# Altium PCB Ethernet_bridge(TOP).PcbDoc
Units mil, origin at the board's own origin, x right, y up, seen from the top; angles counter-clockwise.
Board outline 3110.24 x 1181.1 mil, 2 copper layers (Top Layer, Bottom Layer), stack 34.8 mil thick; 72 components, 56 nets, 258 pads, 0 vias.
Unrouted connection lines stored in the file: 167.
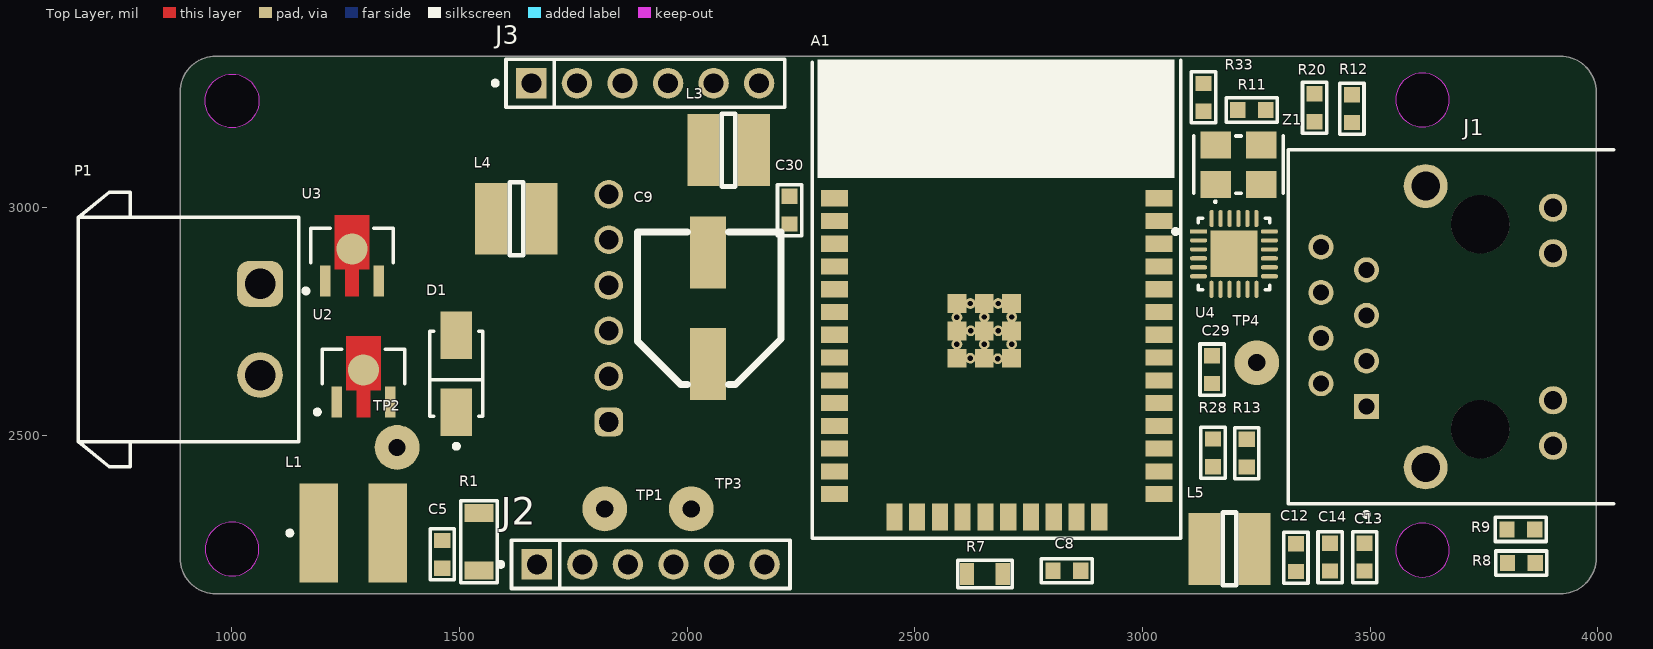
[diagram p0: Top Layer view]
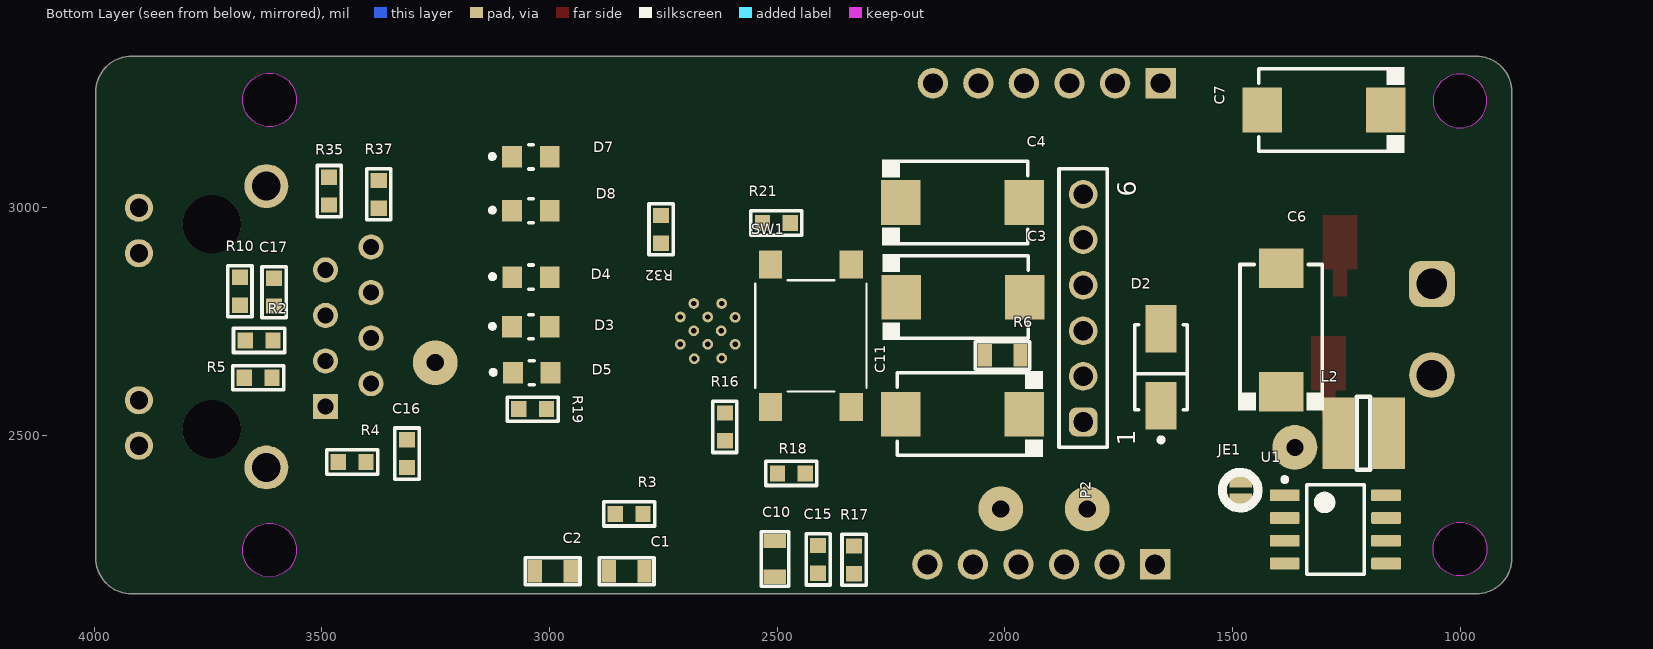
[diagram p1: Bottom Layer view, seen from below]

## Layer stack, top to bottom
Top Solder: solder mask 0.4, Solder Resist, Dk 3.5
Top Layer: signal copper 1.4
Dielectric 1: core 32, Core-025, Dk 4.6
Bottom Layer: signal copper 1.4
Bottom Solder: solder mask 0.4, Solder Resist, Dk 3.5

## Board outline
964.99,2151.25 cw(c964.99,2229.99) 886.25,2229.99 886.25,3253.61 cw(c964.99,3253.61) 964.99,3332.35 3917.75,3332.35 cw(c3917.75,3253.61) 3996.49,3253.61 3996.49,2229.99 cw(c3917.75,2229.99) 3917.75,2151.25
cut-out: 3555.94,2247.39 ccw(c3614.99,2247.39) 3614.99,2188.34 ccw(c3614.99,2247.39) 3674.05,2247.39 ccw(c3614.99,2247.39) 3614.99,2306.45 ccw(c3614.99,2247.39)
cut-out: 3555.94,3236.21 ccw(c3614.99,3236.21) 3614.99,3177.16 ccw(c3614.99,3236.21) 3674.05,3236.21 ccw(c3614.99,3236.21) 3614.99,3295.27 ccw(c3614.99,3236.21)
cut-out: 1000.42,3174.87 cw(c1000.42,3233.93) 941.37,3233.93 cw(c1000.42,3233.93) 1000.42,3292.98 cw(c1000.42,3233.93) 1059.48,3233.93 cw(c1000.42,3233.93)
cut-out: 941.37,2249.68 ccw(c1000.42,2249.68) 1000.42,2190.62 ccw(c1000.42,2249.68) 1059.48,2249.68 ccw(c1000.42,2249.68) 1000.42,2308.73 ccw(c1000.42,2249.68)

## Design rules (kind name [scope] priority, off if disabled: settings)
Clearance [All] p1: gap=1 ignorepadtopadclearanceinfootprint=TRUE
ComponentClearance [All] p1: gap=-100 collisioncheckmode=3 verticalgap=-100 showdistances=FALSE
PolygonConnect [All] p1: connectstyle=Relief reliefconductorwidth=10 reliefentries=4 polygonreliefangle="90 Angle" airgapwidth=10
RoutingVias [All] p1: holewidth=28 width=50 viastyle="Through Hole" minholewidth=28 minwidth=50 maxholewidth=28 maxwidth=50
SolderMaskExpansion [All] p1: expansion=4 istentingtop=FALSE
SupplyNets "Schematic Supply Nets_6" [InNet('GND')] p1: voltage=0.000
SupplyNets "Schematic Supply Nets_5" [InNet('+5V')] p2: voltage=0.000
SupplyNets "Schematic Supply Nets_4" [InNet('VCC')] p3: voltage=0.000
SupplyNets "Schematic Supply Nets_2" [InNet('+3V3_MCU')] p4: voltage=0.000
SupplyNets "Schematic Supply Nets_1" [InNet('3v3')] p5: voltage=0.000
Width [All] p1: maxlimit=10 minlimit=10 preferedwidth=10
29 further rules are at their usual default settings.

## Components (designator, comment, footprint, x,y, rotation, side; value= is the part's Value field where it differs from the comment)
A1 "MOD-ESP32-WROOM-32E" MOD-ESP32-WROOM-32E 2680.09,2670.34 r0 top
C1 "10uF" CAP-0805 2830.63,2200.99 r180 bottom
C2 "0.1uF" CAP-0805 2993,2201 r180 bottom
C3 "100uF_16V" CAP-TAN-D 2092,2803 r180 bottom
C4 "100uF_16V" CAP-TAN-D 2093,3011 r180 bottom
C5 "470pF" CAP-0603 1462,2238 r90 top
C6 "100uF_16V" CAP-TAN-D 1393,2731 r90 bottom
C7 "100uF_16V" CAP-TAN-D 1299,3214 r0 bottom
C8 "0.1uF" CAP-0603 2834,2202 r0 top
C9 "330uF 25V" CAP_SMD_Size_E 2046,2781 r270 top
C10 "0.47uF" CAP-0805 2505,2228 r90 bottom
C11 "47uF_16V" CAP-TAN-D 2093,2546 r0 bottom
C12 "0.1uF" CAP-0603 3337,2231 r90 top
C13 "1uF" CAP-0603 3488,2232 r90 top
C14 "470pF" CAP-0603 3412,2232 r90 top
C15 "0.1uF" CAP-0603 2410,2227 r90 bottom
C16 "0.1uF" CAP-0603 3313,2459.51 r90 bottom
C17 "22nF" CAP-0603 3605,2814 r90 bottom
C29 "0.1uF" CAP-0603 3153,2644 r90 top
C30 "0.1uF" CAP-0603 2225,2994 r90 top
D1 "ES1G" FP-403AE-MFG 1493,2635 r90 top
D2 "SS14" DO-214-AC 1657,2649 r270 bottom
D3 "LED" LED_GREEN 3041,2738 r180 bottom
D4 "LED" LED_RED 3040.66,2847 r180 bottom
D5 "LED" LED_RED 3039,2637 r180 bottom
D7 "LED" LED_GREEN 3041,3111 r180 bottom
D8 "LED" LED_RED 3041,2993 r180 bottom
J1 "RJ45" RJ-45 3744.95,2738 r90 top
J2 "PLS-2.54x6_25mm" PLS2.54x25mm 1920,2216 r0 top
J3 "PLS-2.54x6_25mm" PLS2.54x25mm 1908,3273 r0 top
JE1 "Jumper" JE 1483,2379 r180 bottom
L1 "470µH" WE-PD2_5848 1267,2285 r0 top
L2 "220uH" Coil_4.5x4.5_mm 1212,2504 r180 bottom
L3 "33uH" Coil_4.5x4.5_mm 2091,3126 r0 top
L4 "220uH" Coil_4.5x4.5_mm 1625,2975 r0 top
L5 "470uH" Coil_4.5x4.5_mm 3191,2250 r0 top
P1 "691305540002" 691305540002 904.52,2732 r270 top
P2 "61300611121" 61300611121 1828,2779 r90 bottom
R1 "0.33" RES-1206 1543,2266 r90 top
R2 "49.9R 1%" RES-0603 3638,2708 r180 bottom
R3 "49.9R 1%" RES-0603 2825,2327 r180 bottom
R4 "49.9R 1%" RES-0603 3433.49,2441 r180 bottom
R5 "49.9R 1%" RES-0603 3640,2626 r180 bottom
R6 "3.8K" RES-0805 2005,2675 r180 bottom
R7 "1.2K" RES-0805 2654,2195 r0 top
R8 "1K" RES-0603 3832,2219 r0 top
R9 "1K" RES-0603 3831,2293 r0 top
R10 "33R" RES-0603 3680,2816 r90 bottom
R11 "12.1K  1%" RES-0603 3240,3214 r0 top
R12 "1.5K" RES-0603 3460,3217 r90 top
R13 "10K" RES-0603 3229,2460.51 r90 top
R16 "10K" RES-0603 2615,2518 r90 bottom
R17 "220" RES-0603 2331,2226 r90 bottom
R18 "220" RES-0603 2469,2416 r180 bottom
R19 "220" RES-0603 3037,2557 r180 bottom
R20 "10K" RES-0603 3378,3219 r90 top
R21 "10K" RES-0603 2502,2966 r180 bottom
R28 "10K" RES-0603 3155,2461 r90 top
R32 "220" RES-0603 2755,2952 r270 bottom
R33 "220" RES-0603 3134,3242 r90 top
R35 "33R" RES-0603 3484,3036 r90 bottom
R37 "10K" RES-0603 3375,3029 r90 bottom
SW1 "430152050826" 430152050826 2426,2718 r90 bottom
TP1 "Test_Point_PCB" Test_Point 1819,2338 r0 top
TP2 "Test_Point_PCB" Test_Point 1363,2473 r0 top
TP3 "Test_Point_PCB" Pin_Test_Point(Orange) 2009,2338 r0 top
TP4 "Test_Point_PCB" Test_Point 3251,2659 r0 top
U1 "MC34063" SOIC-8_M 1274,2293 r180 bottom
U2 "AMS1117" SOT-89#1 1289.06,2643.12 r0 top
U3 "AMS1117-3.3" SOT-89#2 1264,2909 r0 top
U4 "LAN7820A" 24QFN-4x4B-IPC_A 3201,2898 r0 top
Z1 "50.00 Mhz" "50.00Mhz active quartz" 3211,3094 r0 top

## Footprints (in the part's own frame and the unit in brackets; to place one, negate y for a bottom-side part, rotate by r counter-clockwise, add the part's x,y. Pads: shape width x height; smd on the part's side, far side on the other; paste and mask are expansions set on the pad)
24QFN-4x4B-IPC_A [mm]
  rect 0.961x0.239 smd paste+0 mask+0: 1(-1.976,1.25)
  rrect100% 0.961x0.239 smd paste+0 mask+0: 2(-1.976,0.75) 3(-1.976,0.25) 4(-1.976,-0.25) 5(-1.976,-0.75) 6(-1.976,-1.25) 13(1.976,-1.25) 14(1.976,-0.75) 15(1.976,-0.25) 16(1.976,0.25) 17(1.976,0.75) 18(1.976,1.25)
  rrect100% 0.239x0.961 smd paste+0 mask+0: 7(-1.25,-1.976) 8(-0.75,-1.976) 9(-0.25,-1.976) 10(0.25,-1.976) 11(0.75,-1.976) 12(1.25,-1.976) 19(1.25,1.976) 20(0.75,1.976) 21(0.25,1.976) 22(-0.25,1.976) 23(-0.75,1.976) 24(-1.25,1.976)
  rect 2.6x2.6 smd paste-1000 mask+0: 25(0,0)
  silkscreen extent -3.38,-2 2,2, body extent -2,-2 2,2, height 1
"50.00Mhz active quartz" [mm] "50.00Mhz active quartz"
  rect 1.7x1.5 smd: 1(-1.27,-1.1) 2(1.27,-1.1) 3(1.27,1.1) 4(-1.27,1.1)
  silkscreen extent -2.5,-2.1 2.5,1.6, body extent -2.5,-1.6 2.5,1.6, height 1.29
61300611121 [mm] "Pin Header, pitch 2.54 mm, THT, Vertical, single row, 6p"
  rrect50% 1.6x1.6 hole 1.1: 1(-6.35,0)
  round 1.6 hole 1.1: 2(-3.81,0) 3(-1.27,0) 4(1.27,0) 5(3.81,0) 6(6.35,0)
  silkscreen extent -7.77,-1.35 7.77,1.35, body extent -7.62,-1.27 7.62,1.27, height 8.57
430152050826 [mm] "SMD Tact Switch, body 6x6mm"
  rect 1.55x1.3 smd: A1(-3.975,2.25) A2(3.975,2.25) B1(-3.975,-2.25) B2(3.975,-2.25)
  silkscreen extent -3.1,-3.1 3.1,3.1, body extent -4.5,-3.1 4.5,3.1, height 5
691305540002 [mm] "5,08mm - PCB Header Horizontal Entry with Plastic Latches - 02p"
  rrect50% 2.55x2.55 hole 1.7: 1(-2.54,4)
  round 2.55 hole 1.7: 2(2.54,4)
  silkscreen extent -7.65,-6.15 7.65,6.15, body extent -7.48,-6 7.48,6, height 8.63
CAP-0603 [mm]
  rect 0.85x0.9 smd: 1(-0.775,0) 2(0.775,0)
  silkscreen extent -1.43,-0.67 1.43,0.67, body extent -0.8,-0.4 0.8,0.4, height 0.8
CAP-0805 [mm]
  rect 0.8x1.25 smd mask+0.015: 1(-1,0) 2(1,0)
  silkscreen extent -1.52,-0.76 1.52,0.76, body extent -1,-0.62 1,0.63, height 0.8
CAP-TAN-D [mm]
  rect 2.2x2.5 smd: 1(-3.45,0) 2(3.45,0)
  silkscreen extent -4.5,-2.4 3.65,2.4, body extent -3.8,-2.3 3.8,2.3, height 4
CAP_SMD_Size_E [mm]
  rect 4x2 smd: 1(3.175,0) 2(-3.048,0)
  silkscreen extent -4.19,-3.94 4.32,4.06, body extent -4.25,-4 4.25,4, height 10.59
Coil_4.5x4.5_mm [mm]
  rect 1.8x4 smd: 1(-1.397,0) 2(1.397,0)
  silkscreen extent -0.38,-2.03 0.38,2.03, body extent -2.07,-2.07 2.07,2.07, height 2.8
DO-214-AC [mm]
  rect 2.65x1.75 smd paste+0 mask+0: 1(-2.15,0) 2(2.15,0)
  silkscreen extent -2.37,-1.48 4.17,1.48, body extent -2.6,-1.36 2.6,1.36, height 2.5
FP-403AE-MFG [mm]
  rect 2.65x1.75 smd paste+0 mask+0: 1(-2.15,0) 2(2.15,0)
  silkscreen extent -4.17,-1.48 2.37,1.48, body extent -3.57,-1.58 3.57,1.58, height 0.25
JE [mil]
  rect 50x27.56 smd: 1(1,20) 2(1,-21)
  silkscreen extent -39,-39 39,39
LED_GREEN [mm]
  rect 1.1x1.2 smd paste+0 mask+0: 1(-1.05,0) 2(1.05,0)
  silkscreen extent -2.28,-0.67 0.13,0.67, body extent -1,-0.63 1,0.63, height 0.8
LED_RED [mm]
  rect 1.1x1.2 smd paste+0 mask+0: 1(-1.05,0) 2(1.05,0)
  silkscreen extent -2.28,-0.67 0.13,0.67, body extent -1,-0.63 1,0.63, height 0.8
MOD-ESP32-WROOM-32E [mm]
  rect 1.5x0.9 smd paste+0 mask+0.05: 1(-9.05,8.89) 2(-9.05,7.62) 3(-9.05,6.35) 4(-9.05,5.08) 5(-9.05,3.81) 6(-9.05,2.54) 7(-9.05,1.27) 8(-9.05,0) 9(-9.05,-1.27) 10(-9.05,-2.54) 11(-9.05,-3.81) 12(-9.05,-5.08) 13(-9.05,-6.35) 14(-9.05,-7.62) 25(9.05,-7.62) 26(9.05,-6.35) 27(9.05,-5.08) 28(9.05,-3.81) 29(9.05,-2.54) 30(9.05,-1.27) 31(9.05,0) 32(9.05,1.27) 33(9.05,2.54) 34(9.05,3.81) 35(9.05,5.08) 36(9.05,6.35) 37(9.05,7.62) 38(9.05,8.89)
  rect 0.9x1.5 smd paste+0 mask+0.05: 15(-5.715,-8.89) 16(-4.445,-8.89) 17(-3.175,-8.89) 18(-1.905,-8.89) 19(-0.635,-8.89) 20(0.635,-8.89) 21(1.905,-8.89) 22(3.175,-8.89) 23(4.445,-8.89) 24(5.715,-8.89)
  rect 1.05x1.05 smd paste+0 mask+0.05: 39(-2.225,-0.035) 39(-2.225,1.49) 39(-2.225,3.015) 39(-0.7,-0.035) 39(-0.7,1.49) 39(-0.7,3.015) 39(0.825,-0.035) 39(0.825,1.49) 39(0.825,3.015)
  round 0.6 hole 0.3: 39(-2.225,0.74) 39(-2.225,2.24) 39(-1.475,-0.035) 39(-1.475,3.015) 39(-1.45,1.49) 39(-0.7,0.74) 39(-0.7,2.265) 39(0.05,-0.06) 39(0.075,1.49) 39(0.075,3.015) 39(0.825,0.74) 39(0.825,2.265)
  silkscreen extent -10.3,-10.08 10.25,16.62, body extent -9.04,-9.16 9.04,16.38, height 3
Pin_Test_Point(Orange) [mm]
  round 2.5 hole 0.95: 1(0,0)
  body extent -1.3,-1.78 1.3,1.78, height 6.93
PLS2.54x25mm [mm]
  rect 1.7x1.7 hole 1.1 paste-2539.97 mask+0: 1(-6.35,0)
  round 1.7 hole 1.1 paste-2539.97 mask+0: 2(-3.81,0) 3(-1.27,0) 4(1.27,0) 5(3.81,0) 6(6.35,0)
  silkscreen extent -8.49,-1.35 7.77,1.35, body extent -7.62,-1.27 7.62,1.27, height 16
RES-0603 [mm]
  rect 0.85x0.9 smd: 1(-0.775,0) 2(0.775,0)
  silkscreen extent -1.43,-0.67 1.43,0.67, body extent -0.85,-0.45 0.85,0.45, height 0.55
RES-0805 [mm]
  rect 0.8x1.25 smd mask+0.015: 1(-1,0) 2(1,0)
  silkscreen extent -1.52,-0.76 1.52,0.76, body extent -1,-0.62 1,0.63, height 0.6
RES-1206 [mm]
  rect 1x1.6 smd: 1(-1.6,0) 2(1.6,0)
  silkscreen extent -2.29,-1.02 2.29,1.02, body extent -1.6,-0.8 1.6,0.8, height 0.6
RJ-45 [mm] "RJ-45  connector"
  rect 1.4x1.4 hole 0.9 paste-2539.97 mask+0: 1(-4.445,6.425)
  round 1.4 hole 0.9 paste-2539.97 mask+0: 2(-3.175,8.965) 3(-1.905,6.425) 4(-0.635,8.965) 5(0.635,6.425) 6(1.905,8.965) 7(3.175,6.425) 8(4.445,8.965)
  round 1.57 hole 1.02 paste-2539.97 mask+0: 9(-6.64,-3.985) 10(-4.1,-3.985) 11(4.1,-3.985) 12(6.64,-3.985)
  round 2.45 hole 1.6 paste-2539.97 mask+0: 13(-7.85,3.125) 14(7.85,3.125)
  round 3.25 hole 3.25 unplated paste-2539.97 mask+0: ""(-5.715,0.075) ""(5.715,0.075)
  silkscreen extent -10.59,-7.37 9.87,10.8, body extent -9.97,-10.9 9.97,10.9, height 0.25
SOIC-8_M [mm]
  rrect15% 1.65x0.65 smd: 1(-2.825,1.905) 2(-2.825,0.635) 3(-2.825,-0.635) 4(-2.825,-1.905) 5(2.825,-1.905) 6(2.825,-0.635) 7(2.825,0.635) 8(2.825,1.905)
  silkscreen extent -2.95,-2.5 1.6,2.9, body extent -3,-2.45 3,2.45, height 1.63
SOT-89#1 [mm]
  rect 0.58x1.73 smd paste+0 mask+0: 2(-1.5,-1.781) 3(1.5,-1.781)
  round 1.74 smd paste+0 mask+0: 2(0,0)
  Top Layer region: -0.38,-2.646 -0.38,-1.146 -0.967,-1.146 -0.967,1.884 0.967,1.884 0.967,-1.146 0.38,-1.146 0.38,-2.646
  silkscreen extent -2.7,-2.47 2.3,1.15, body extent -2.4,-2.75 2.4,1.98, height 0.25
SOT-89#2 [mm]
  rect 0.58x1.73 smd paste+0 mask+0: 1(-1.5,-1.781) 3(1.5,-1.781)
  round 1.74 smd paste+0 mask+0: 2(0,0)
  Top Layer region: -0.38,-2.646 -0.38,-1.146 -0.967,-1.146 -0.967,1.884 0.967,1.884 0.967,-1.146 0.38,-1.146 0.38,-2.646
  silkscreen extent -2.7,-2.47 2.3,1.15, body extent -2.4,-2.75 2.4,1.98, height 0.25
Test_Point [mm]
  round 2.5 hole 0.95: 1(0,0)
WE-PD2_5848 [mm] "SMD Power Inductor, 2-Leads, body 5.8x5.2mm"
  rect 2.15x5.5 smd: 1(-1.925,0) 2(1.925,0)
  silkscreen extent -3.67,-0.12 -3.42,0.12, body extent -2.9,-2.6 2.89,2.6, height 4.48

## Part data
C1 C2 C5 C8 C10 C12 C13 C14 C15 C16 C17 C29 C30: library part CAP-NON-POLAR
C3 C4 C6 C7 C9: library part CAP_POL_SMD
C11: library part CAP-POLAR
D1: "Ultrafast"
D3 D4 D5 D7 D8: "WURTH ELEKTRONIK - 151031YS06000 - LED, Yellow, Through Hole, T-1 (3mm), 30 mA, 2 V, 590 nm", Manufacturer_Name="Wurth Elektronik", Manufacturer_Part_Number=151031YS06000, Mouser Part Number=710-151031YS06000, Datasheet Link=https://katalog.we-online.de/led/datasheet/151031YS06000.pdf, Geometry.Height=5.5mm, Mouser Price/Stock=https://www.mouser.co.uk/ProductDetail/Wurth-Elektronik/151031YS06000?qs=LlUlMxKIyB3xSYYW%252BcuBiQ%3D%3D
J1: library part HRK1-1B72F09
JE1: library part JE
L1: library part 744774033, "WE-PD2 SMT Power Inductor, size 5848, 3.3µH, 4A, 0.06Ω", Case/Size Code=5848, DC Resistance=0.042Ω, DC Resistance Max=0.06Ω, Inductance=3.3µH, Manufacturer="Wurth Elektronik", Operating Temperature Max=125°C, Operating Temperature Min=-40°C, Rated Current=4A, Saturation Current=7.5A, Self Resonant Frequency=43MHz, Category="Unshielded Power Inductors", ComponentLink1Description="Website Link", ComponentLink1URL=https://www.we-online.com/redexpert/article/744774033?ad, ComponentLink2Description="Datasheet Link", ComponentLink2URL=https://www.we-online.com/redexpert/spec/744774033?ad, Height=4.5mm, Length=5.8mm, Manufacturer Part Number=744774033, Match Code=WE-PD2, Mount="Surface Mount", Packaging="Tape and Reel", Width=5.2mm, Simulation ModelName=5848_744774033_3.3u, Simulation ModelText=".subckt 5848_744774033_3.3u 1 2 / Rp 1 2 12000 / Cp 1 2 3.4p / Rs 1 N3 0.042 / L1 N3 2 3.3u / .ends 5848_744774033_3.3u", Simulation PortMap=(1:1),(2:2)
L2 L3 L4 L5: library part Coil
P1: "WR-TBL Series 3055 PCB Header Horizontal Entry with Plastic Latches, THT, pitch 5.08mm, 2p", Manufacturer="Wurth Elektronik", Operating Temperature Max=105°C, Operating Temperature Min=-40°C, Rated Current=16A, Working Voltage=300V, Application=Pluggable, Category="Terminal Blocks", ComponentLink1Description="Website Link", ComponentLink1URL=https://www.we-online.com/redexpert/article/691305540002?ad, ComponentLink2Description="Datasheet Link", ComponentLink2URL=https://www.we-online.com/redexpert/spec/691305540002?ad, Manufacturer Part Number=691305540002, Match Code=WR-TBL, Modularity=No, Mount="Through Hole", Number of Pins=2, Number of Rows=1, Orientation=Horizontal, Packaging=Box, Pitch=5.08mm
P2: "WR-PHD Pin Header, THT, Vertical, pitch 2.54mm, 1 Row, 6P", Contact Resistance=20mΩ, Manufacturer="Wurth Elektronik", Operating Temperature Max=105°C, Operating Temperature Min=-40°C, Rated Current=3A, Withstanding Voltage=500V, Working Voltage=250V, Category="Board-to-Board Connectors", ComponentLink1Description="Website Link", ComponentLink1URL=https://www.we-online.com/redexpert/article/61300611121?ad, ComponentLink2Description="Datasheet Link", ComponentLink2URL=https://www.we-online.com/redexpert/spec/61300611121?ad, Gender="Pin Header", Manufacturer Part Number=61300611121, Match Code=WR-PHD, Mount="Through Hole", Number of Pins=6, Number of Rows=1, Orientation=Vertical, Packaging=Bag, Pitch=2.54mm
R1 R2 R3 R4 R5 R7 R8 R9 R10 R12 R13 R16 R17 R18 R19 R20 R21 R28 R32 R33 R35 R37: library part RES-CONST
R6: library part RES-CONST, "10K"
R11: library part RES-CONST, "12.1K"
SW1: "WS-TASV SMT Tact Switch, 6mm x 6mm, 260gf, SPST-NO, 12V, 50mA", Manufacturer="Wurth Elektronik", Max Operating Temperature=85°C, Min Operating Temperature=-40°C, Rated Current=50mA, Rated Voltage (DC)=12V, Category="Tact Switch", Circuit=SPST-NO, ComponentLink1Description="Website Link", ComponentLink1URL=https://www.we-online.com/redexpert/article/430152050826?ad, ComponentLink2Description="Datasheet Link", ComponentLink2URL=https://www.we-online.com/redexpert/spec/430152050826?ad, Contact Material="Stainless Steel", Contact Plating=Silver, Height=5mm, Length=6mm, Manufacturer Part Number=430152050826, Match Code=WS-TASV, Mount="Surface Mount", Operation Force=260gf, Packaging="Tape and Reel", Terminal Material="Copper Alloy", Terminal Plating=Silver, Washable=No, Width=6mm
TP1 TP2 TP3 TP4: library part TP_PCB?, "Test_Point"
U3: library part AMS1117
Z1: library part Crystal_50Mhz_active

## Nets (pads, with @x,y where several pads share a name; then routed paths per layer and width w, separated by ;. In a path a pad name is that pad's centre, name@x,y a point inside that pad or via, vN(x,y) a via of type N, cw(c..) or ccw(c..) an arc to the next point about the centre after c; other vN are vias at no path point)
3v3: C16.2 L3.1 L4.1 R12.2 R13.2 R20.2 R28.2 TP4.1 U3.2 U4.9 Z1.4
+3V3_MCU: A1.2 C11.1 C12.2 J2.4 J3.1 L4.2 P2.1 R16.2 R21.2
+5V: C7.1 J2.3 U2.2@1289.06,2643.12
GND: A1.1 A1.15 A1.38 A1.39 C1.1 C2.1 C3.2 C4.2 C5.2 C6.2 C7.2 C8.1 C9.2 C10.2 C11.2 C12.1 C13.1 C14.1 C15.1 C16.1 C17.1 C29.1 C30.1 D1.2 D3.2 D4.2 D5.2 D7.2 D8.2 J1.13 J1.14 J2.5 J2.6 J3.6 P1.1 P2.2 R7.1 R11.2 R37.1 SW1.B1 SW1.B2 TP3.1 U1.4 U2.2@1230,2573 U3.1 U4.25 Z1.2
NetA1_3: A1.3 C30.2 P2.5 R21.1
NetA1_7: A1.7 J3.4
NetA1_8: A1.8 R16.1 SW1.A1 SW1.A2
NetA1_9: A1.9 J3.5 R33.2
NetA1_10: A1.10 U4.8
NetA1_11: A1.11 U4.7
NetA1_12: A1.12 U4.11
NetA1_13: A1.13 R18.2
NetA1_14: A1.14 R17.2
NetA1_16: A1.16 R13.1 U4.10
NetA1_23: A1.23 R19.2
NetA1_24: A1.24 J3.2 R32.2
NetA1_25: A1.25 L5.1 R28.1 R35.1 U4.14
NetA1_27: A1.27 R37.2 Z1.1
NetA1_28: A1.28 J3.3
NetA1_30: A1.30 R12.1 U4.12
NetA1_31: A1.31 U4.17
NetA1_33: A1.33 U4.16
NetA1_34: A1.34 P2.3
NetA1_35: A1.35 P2.4
NetA1_36: A1.36 U4.18
NetA1_37: A1.37 U4.13
NetC1_2: C1.2 C2.2 J1.4 J1.5 J1.9 J1.11 L3.2 R2.2 R3.2 R4.2 R5.2 U4.1 U4.19
NetC3_1: C3.1 JE1.2 L1.2 R6.1
NetC4_1: C4.1 C8.2 C15.2 L2.2 TP2.1 U2.3 U3.3
NetC5_1: C5.1 U1.3
NetC6_1: C6.1 JE1.1 L2.1
NetC13_2: C13.2 C14.2 U4.6
NetC17_2: C17.2 J1.7 J1.8
NetC29_2: C29.2 R20.1 U4.15
NetD1_1: D1.1 L1.1 TP1.1 U1.2
NetD2_1: D2.1 P1.2
NetD3_1: D3.1 R17.1
NetD4_1: D4.1 R18.1
NetD5_1: D5.1 R19.1
NetD7_1: D7.1 R33.1
NetD8_1: D8.1 R32.1
NetJ1_1: J1.1 R2.1 U4.21
NetJ1_2: J1.2 R4.1 U4.20
NetJ1_3: J1.3 R3.1 U4.23
NetJ1_6: J1.6 R5.1 U4.22
NetJ1_10: J1.10 R8.2
NetJ1_12: J1.12 R9.2
NetL5_2: L5.2 P2.6
NetR1_2: R1.2 U1.1 U1.7 U1.8
NetR6_2: R6.2 R7.2 U1.5
NetR8_1: R8.1 U4.3
NetR9_1: R9.1 U4.2
NetR10_1: R10.1 R35.2 Z1.3
NetR10_2: R10.2 U4.5
NetR11_1: R11.1 U4.24
VCC: C9.1 C10.1 D2.2 J2.1 J2.2 R1.1 U1.6
pads on no net: A1.4 A1.5 A1.6 A1.17 A1.18 A1.19 A1.20 A1.21 A1.22 A1.26 A1.29 A1.32 J1. U4.4

## Silkscreen, mask and mechanical layers (free items; w line width, h text height)
Mechanical 1:
  circle w0.5: c3614.99,2247.39 r59.06
  circle w0.5: c3614.99,3236.21 r59.06
  circle w0.5: c1000.42,3233.93 r59.06
  circle w0.5: c1000.42,2249.68 r59.06
  lines w0.5: 886.25,2229.99 ccw(c964.99,2229.99) 964.99,2151.25 3917.75,2151.25 ccw(c3917.75,2229.99) 3996.49,2229.99 3996.49,3253.61 ccw(c3917.75,3253.61) 3917.75,3332.35 964.99,3332.35 ccw(c964.99,3253.61) 886.25,3253.61 886.25,2229.99

## Text inside footprints (layer, text, board x,y; h text height)
P2: Bottom Overlay "1" at 1714,2477 h40 r270; Bottom Overlay "6" at 1712,3023 h40 r270